# Altium PCB Comb_Generator_PCB.PcbDoc
Units mil, origin at the board's own origin, x right, y up, seen from the top; angles counter-clockwise.
Board outline 4523.62 x 2315 mil, 2 copper layers (Top Layer, Bottom Layer), stack 41.756 mil thick; 62 components, 73 nets, 211 pads, 256 vias.
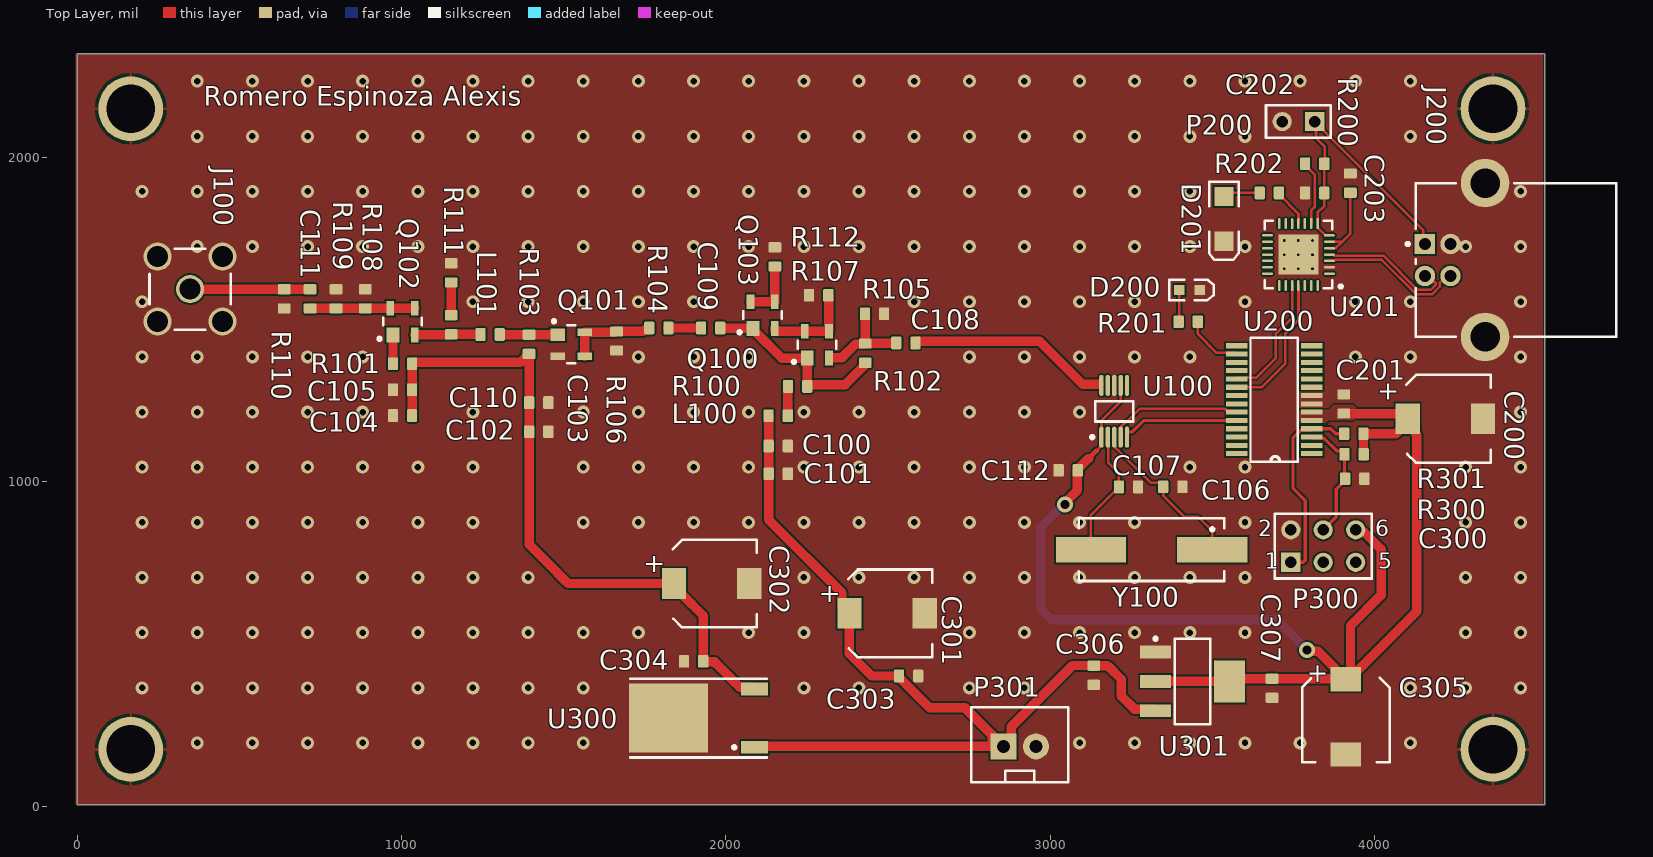
[diagram p0: Top Layer view]
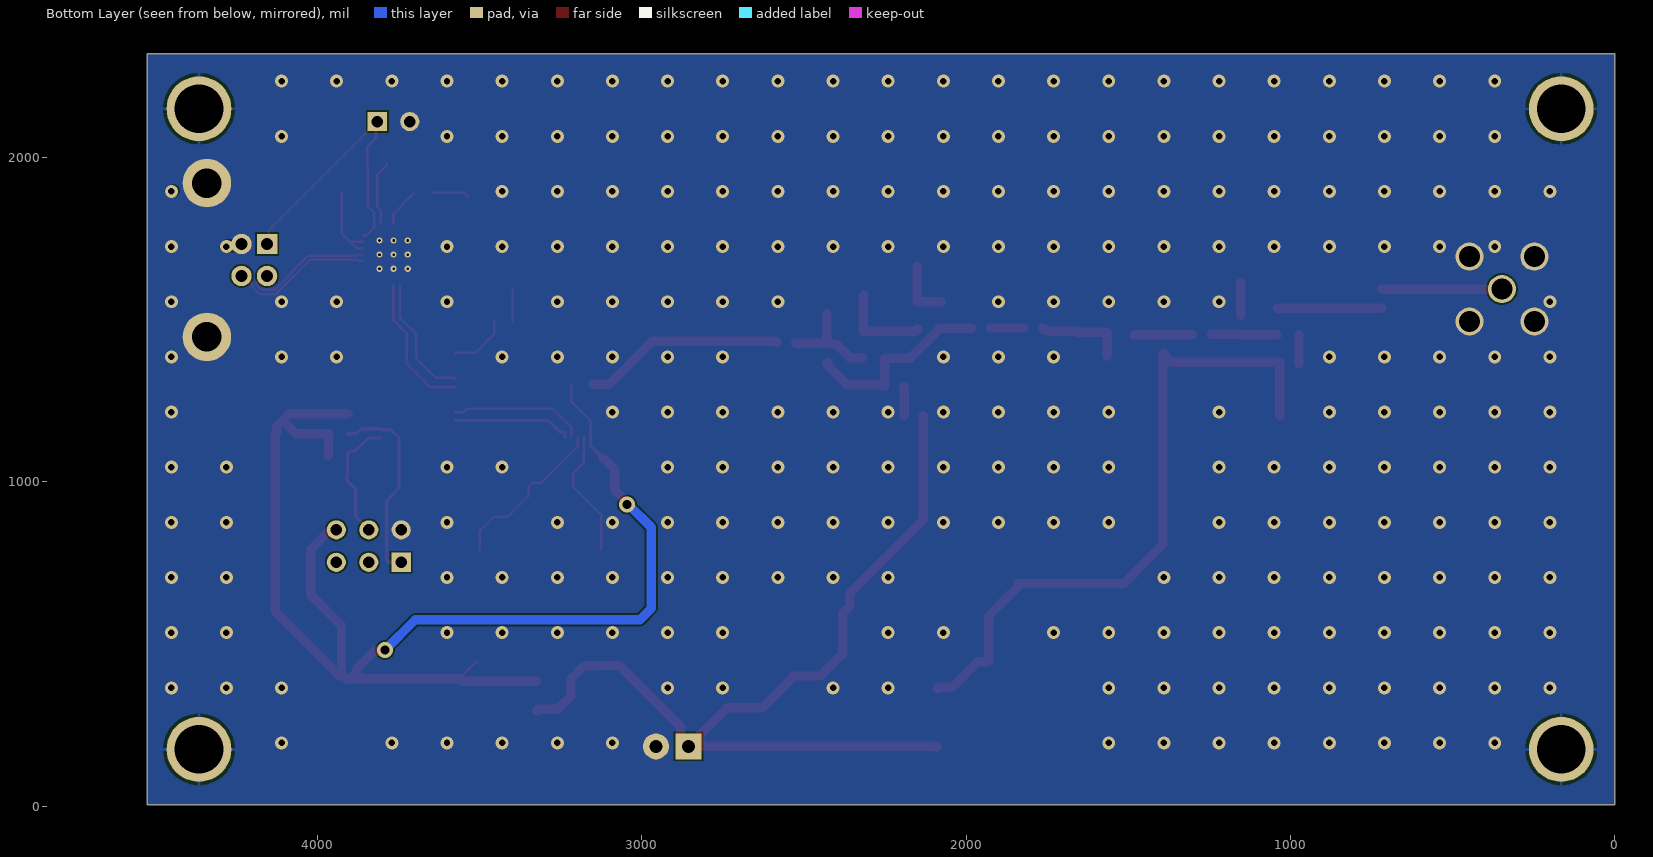
[diagram p1: Bottom Layer view, seen from below]
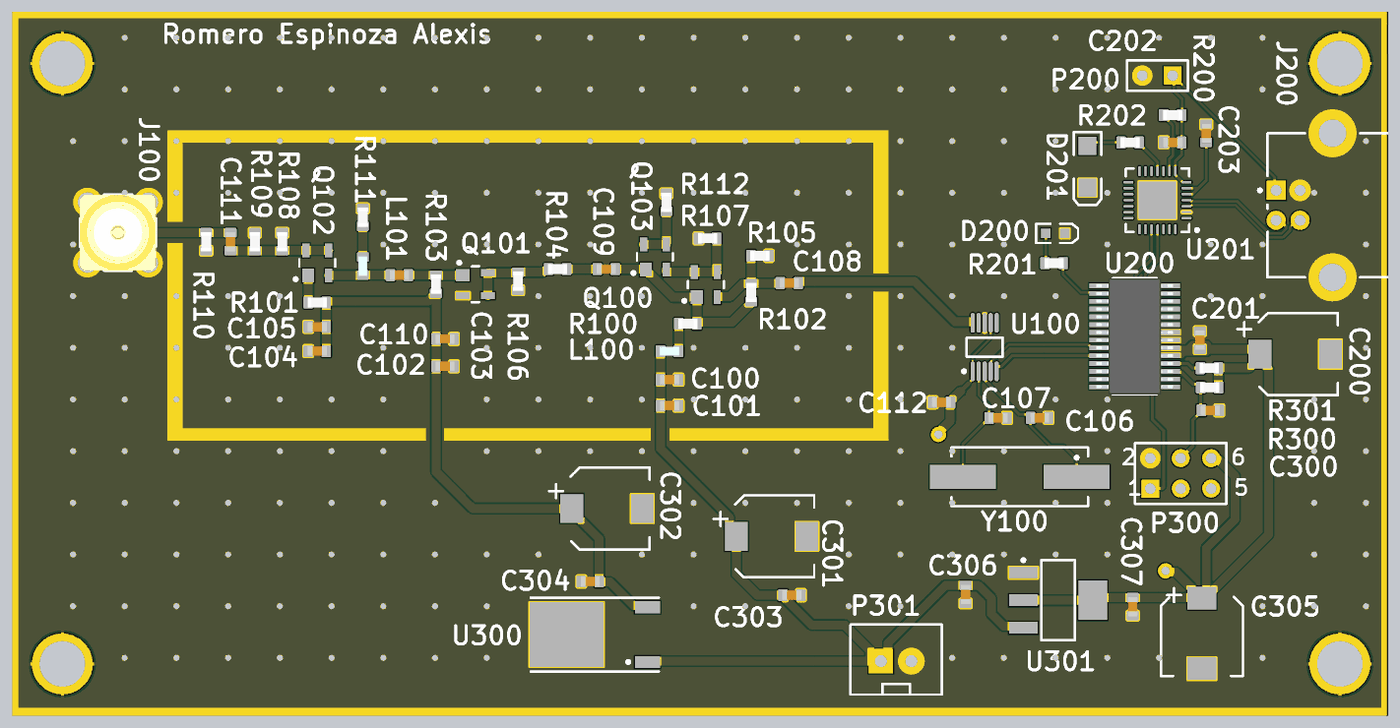
[diagram p2: 3D render of the assembled board from above, using the file's embedded part models]

## Layer stack, top to bottom
Top Solder: solder mask 1, Solder Resist, Dk 4
Top Layer: signal copper 1.378
Dielectric 1: core 39, Core-043, Dk 4.8
Bottom Layer: signal copper 1.378
Bottom Solder: solder mask 1, Solder Resist, Dk 4

## Board outline
0,5 4523.62,5 4523.62,2320 0,2320

## Design rules (kind name [scope] priority, off if disabled: settings)
Clearance [All] p1: gap=5 ignorepadtopadclearanceinfootprint=TRUE
DiffPairsRouting [InDifferentialPairClass('USB')] p1: maxlimit=5 minlimit=5 mostfreqgap=5 toplayer_minwidth=7.66 toplayer_maxwidth=7.66 toplayer_prefwidth=7.66 bottomlayer_minwidth=7.66 bottomlayer_maxwidth=7.66 bottomlayer_prefwidth=7.66 impedanceprofiledriven=TRUE impedanceprofileid={3DF94B06-C9B4-486B-9F6B-04F363C602BF} impedanceprofilevalue=90.000000 maxuncoupledlength=500
HoleSize [All] p1: absolutevalues=TRUE maxlimit=150 minlimit=1 maxpercent=80.000 minpercent=20.000
MinimumSolderMaskSliver [All] p1: minsoldermaskwidth=1.97
PlaneConnect [All] p1: planeconnectstyle=Direct reliefexpansion=20 reliefentries=4 reliefconductorwidth=10 reliefairgap=10
PolygonConnect [All] p1: connectstyle=Direct reliefconductorwidth=10 reliefentries=4 polygonreliefangle="90 Angle" airgapwidth=10
RoutingVias [All] p1: holewidth=28 width=50 viastyle="Through Hole" minholewidth=20 minwidth=40 maxholewidth=28 maxwidth=50
SilkToSilkClearance [All] p1: silktosilkclearance=1.97
SilkToSolderMaskClearance [IsPad] p1: minsilkscreentomaskgap=3.94 clearancetoexposedcopper=TRUE
SolderMaskExpansion [All] p1: expansion=4 istentingtop=FALSE
SupplyNets "Schematic Supply Nets_5" [InNet('REGIN')] p1: voltage=0.000
SupplyNets "Schematic Supply Nets_4" [InNet('+3.3')] p2: voltage=0.000
SupplyNets "Schematic Supply Nets_3" [InNet('+9')] p3: voltage=0.000
SupplyNets "Schematic Supply Nets_2" [InNet('GND')] p4: voltage=0.000
SupplyNets "Schematic Supply Nets" [InNet('+15')] p5: voltage=0.000
Width RF [InNetClass('RF_IMPEDANCE')] p1: maxlimit=29 minlimit=29 preferedwidth=29 impedanceprofiledriven=TRUE impedanceprofileid={12B5DFE3-A9B6-42D8-8155-5930BCDDC55F} impedanceprofilevalue=50.000000 minimp=50.000000 maximp=50.000000 favimp=50.000000
Width [All] p2: maxlimit=30 minlimit=8 preferedwidth=10
24 further rules are at their usual default settings.

## Classes and differential pairs
differential pair class USB: USB
net class RF_IMPEDANCE: +9 +15 GND NetC108_1 NetC108_2 NetC109_1 NetC109_2 NetC110_1 NetC110_2 NetC111_1 NetL100_2 NetL101_2 NetQ100_3 NetQ101_3 NetQ102_1 NetQ103_3 out
component class U_3_Alimentacion: C300 C301 C302 C303 C304 C305 C306 C307 P300 P301 R300 R301 U300 U301
component class U_2_Microcontrolador: C200 C201 C202 C203 D200 D201 J200 P200 R200 R201 R202 U200 U201
component class U_1_Comb_Generator_Sch: C100 C101 C102 C103 C104 C105 C106 C107 C108 C109 C110 C111 C112 J100 L100 L101 Q100 Q101 Q102 Q103 R100 R101 R102 R103 R104 R105 R106 R107 R108 R109 R110 R111 R112 U100 Y100
differential pair USB: +USB_P -USB_N

## Components (designator, comment, footprint, x,y, rotation, side; value= is the part's Value field where it differs from the comment)
C100 "1n" CAP_0603 2161.03,1110.18 r0 top
C101 "470p" CAP_0603 2161.03,1024.59 r0 top
C102 "470p" CAP_0603 1422.87,1154.02 r0 top
C103 "1u" CAP_0603 1422.87,1244.02 r0 top
C104 "1n" CAP_0603 1002.87,1204.02 r180 top
C105 "100p" CAP_0603 1002.87,1284.02 r180 top
C106 "3.9p" CAP_0603 3377.4,984.72 r0 top
C107 "3.9p" CAP_0603 3240.79,984.21 r0 top
C108 "1n" CAP_0603 2554.45,1428.07 r0 top
C109 "1n" CAP_0603 1952.87,1474.02 r180 top
C110 "470p" CAP_0603 1272.87,1454.02 r0 top
C111 "C0603" CAP_0603 717.87,1564.02 r90 top
C112 "100n" CAP_0603 3055.12,1035.67 r180 top
C200 "47u/16V" "C SIZE SMD CAPACITOR" 4212.6,1194.29 r0 top value=47
C201 "100n" CAP_0603 3904.33,1239.88 r90 top
C202 "100n" CAP_0603 3814.8,1890.51 r180 top
C203 "100n" CAP_0603 3924.8,1920.51 r90 top
C300 "100n" CAP_0603 3938.31,1009.13 r0 top
C301 "47u/16V" "C SIZE SMD CAPACITOR" 2491.42,594.61 r0 top value=47
C302 "47u/16V" "C SIZE SMD CAPACITOR" 1950.39,686.42 r0 top value=47
C303 "100n" CAP_0603 2563.11,401.3 r0 top
C304 "100n" CAP_0603 1900.39,446.42 r180 top
C305 "47u/16V" "C SIZE SMD CAPACITOR" 3910.87,280.51 r270 top value=47
C306 "100n" CAP_0603 3134.02,403.58 r270 top
C307 "100n" CAP_0603 3683.31,363.5 r270 top
D200 "HSMC-S690" 1.6X0.8X0.7 3428.9,1591.3 r0 top
D201 "HSMG-C150" 3.2X1.6X1.1 3534.8,1810.51 r270 top
J100 "32K101-400L5" ROS-32K101-400L5_V 347.87,1594.02 r270 top
J200 "787780-1" "USB 787780" 4247.48,1683.74 r90 top
L100 "100u" IND_0603 2160.83,1203.7 r0 top
L101 "3.3n" IND_0603 1152.87,1484.02 r90 top
P200 "Header 2" HDR1X2 3814.8,2110.51 r180 top
P300 "Header 3X2" HDR2X3 3741.18,751.85 r0 top
P301 "Conector Molex 2 vias Macho" "MOLEX INDENT 2 LOW PRF" 2855.75,184.29 r0 top
Q100 "BFG540" SOT143B_N 2280.28,1422.68 r90 top
Q101 "BFG540" SOT143B_N 1522.87,1424.02 r0 top
Q102 "BFG540" SOT143B_N 1002.87,1494.02 r90 top
Q103 "BFG540" SOT143B_N 2112.87,1514.02 r90 top
R100 "270" RES_0603 2220.83,1294.02 r180 top
R101 "1k" RES_0603 1002.87,1364.02 r0 top
R102 "560" RES_0603 2429.36,1396.49 r270 top
R103 "100" RES_0603 1392.87,1424.02 r270 top
R104 "10" RES_0603 1792.87,1474.02 r0 top
R105 "470" RES_0603 2457.99,1517.68 r180 top
R106 "100" RES_0603 1662.87,1434.02 r90 top
R107 "82" RES_0603 2285.86,1574.75 r0 top
R108 "1.2k" RES_0603 887.87,1564.02 r270 top
R109 "1.2k" RES_0603 797.87,1564.02 r270 top
R110 "56" RES_0603 637.87,1564.02 r90 top
R111 "24" RES_0603 1152.87,1644.02 r270 top
R112 "2.2" RES_0603 2150.73,1693.39 r270 top
R200 "10k" RES_0603 3814.8,1980.51 r0 top
R201 "1k" RES_0603 3424.96,1493.43 r180 top
R202 "1k" RES_0603 3674.8,1890.51 r180 top
R300 "10k" RES_0603 3936.34,1084.57 r180 top
R301 "10k" RES_0603 3935.35,1148.15 r0 top
U100 "Si5351A-A-GT" SLAB-MSOP-10_N 3196.85,1217.28 r90 top
U200 "" TSSOP28_25.5_295_15X58_SMD 3690,1252.95 r180 top value=MC9S08SH32
U201 "CP2103-GM" SLAB-QFN-28-3125x3125TP_A_N 3764.8,1700.51 r180 top locked
U300 "L78M09ABDT" TO-252 1955.39,271.42 r90 top
U301 "LD1117AS33TR" SOT-223_N 3438.19,384.53 r0 top
Y100 "HC49/4H_SMX" HC49/4H_SMX 3312.09,790.55 r180 top

## Footprints (in the part's own frame and the unit in brackets; to place one, negate y for a bottom-side part, rotate by r counter-clockwise, add the part's x,y. Pads: shape width x height; smd on the part's side, far side on the other; paste and mask are expansions set on the pad)
1.6X0.8X0.7 [mm] "SM LED; 2 Flat Leads"
  rect 0.8x0.8 smd: 1(-0.8,0) 2(0.8,0)
  silkscreen extent -1.6,-0.8 1.9,0.8
3.2X1.6X1.1 [mm] "SM LED; 2 Flat Leads"
  rect 1.5x1.5 smd: 1(-1.75,0) 2(1.75,0)
  silkscreen extent -2.9,-1.15 3.2,1.15
"C SIZE SMD CAPACITOR" [mm]
  rect 1.9x2.4 smd: 1(-2.819,0) 2(3.073,0)
  silkscreen extent -2.92,-3.43 3.68,3.43, body extent -3.47,-3.3 3.73,3.3, height 8.08
CAP_0603 [mm]
  rrect25% 0.8x1 smd: 1(-0.75,0) 2(0.75,0)
  body extent -0.8,-0.4 0.8,0.4, height 0.51
HC49/4H_SMX [mm] "Surface Mount Quartz Crystal; Body 13.4 (inc. leads) x 4.9 mm (LxW max)"
  rect 5.5x2 smd: 1(-4.75,0) 2(4.75,0)
  silkscreen extent -5.7,-2.45 5.7,2.45
HDR1X2 [mm] "Connector; Header; 2 Position"
  rect 1.5x1.5 hole 0.9: 1(0,0)
  round 1.5 hole 0.9: 2(2.54,0)
  silkscreen extent -1.27,-1.27 3.81,1.27
HDR2X3 [mm] "Connector; Header; 3x2 Position"
  rect 1.5x1.5 hole 0.9: 1(0,0)
  round 1.5 hole 0.9: 2(0,2.54) 3(2.54,0) 4(2.54,2.54) 5(5.08,0) 6(5.08,2.54)
  silkscreen extent -1.27,-1.27 6.35,3.81
IND_0603 [mm]
  rrect25% 0.8x1 smd: 1(-0.75,0) 2(0.75,0)
  body extent -0.81,-0.37 0.81,0.37, height 0.87
"MOLEX INDENT 2 LOW PRF" [mil]
  rect 80x80 hole 40: 1(0,0)
  round 80 hole 40: 2(100,0)
  silkscreen extent -100,-110 200,120
RES_0603 [mm]
  rrect25% 0.8x1 smd: 1(-0.75,0) 2(0.75,0)
  body extent -0.8,-0.43 0.8,0.43, height 0.52
ROS-32K101-400L5_V [mm] "SMA Straight Jack, 6.35x6.35x9.5mm, Rosenberger Recommended"
  round 2.2 hole 1.65: 1(0,0) MH(-2.54,2.54) MH(-2.54,-2.54) MH(2.54,2.54) MH(2.54,-2.54)
  silkscreen extent -3.18,-3.18 3.18,3.18, body extent -3.17,-3.17 3.18,3.18, height 9.5
SLAB-MSOP-10_N [mm] "SOP, 10-Leads, Body 3x3mm, Pitch 0.5mm, IPC Medium Density"
  oval 1.65x0.35 smd: 1(-2.025,1) 2(-2.025,0.5) 3(-2.025,0) 4(-2.025,-0.5) 5(-2.025,-1) 6(2.025,-1) 7(2.025,-0.5) 8(2.025,0) 9(2.025,0.5) 10(2.025,1)
  silkscreen extent -2.15,-1.5 0.8,1.85, body extent -1.5,-1.5 1.5,1.5, height 1.1
SLAB-QFN-28-3125x3125TP_A_N [mm] "QFN, 28-Leads, Body 5x5mm, Pitch 0.5mm, Thermal Pad 3.13x3.13mm, IPC Medium Density"
  oval 0.85x0.2 smd: 1(-2.425,1.5) 2(-2.425,1) 3(-2.425,0.5) 4(-2.425,0) 5(-2.425,-0.5) 6(-2.425,-1) 7(-2.425,-1.5) 15(2.425,-1.5) 16(2.425,-1) 17(2.425,-0.5) 18(2.425,0) 19(2.425,0.5) 20(2.425,1) 21(2.425,1.5)
  oval 0.2x0.85 smd: 8(-1.5,-2.425) 9(-1,-2.425) 10(-0.5,-2.425) 11(0,-2.425) 12(0.5,-2.425) 13(1,-2.425) 14(1.5,-2.425) 22(1.5,2.425) 23(1,2.425) 24(0.5,2.425) 25(0,2.425) 26(-0.5,2.425) 27(-1,2.425) 28(-1.5,2.425)
  rect 3.13x3.13 smd: 29(0,0)
  silkscreen extent -3.42,-2.65 2.65,2.65, body extent -2.5,-2.5 2.5,2.5, height 1
SOT143B_N [mm] "SOT143, 4-Leads, Body 2.9x1.3mm, Pitch 1.9mm, Lead Span 2.3mm, IPC Medium Density"
  rect 1.15x1 smd: 1(-1.05,0.75)
  rect 1.15x0.6 smd: 2(-1.05,-0.95) 3(1.05,-0.95) 4(1.05,0.95)
  silkscreen extent -1.47,-1.5 0.3,1.92, body extent -0.7,-1.52 0.7,1.52, height 1.1
SOT-223_N [mm] "SOT223, 4-Leads, Body 6.5x3.5mm, Pitch 2.3mm, Lead Span 7mm, IPC Medium Density"
  rect 2.4x1 smd: 1(-2.9,2.3) 2(-2.9,0) 3(-2.9,-2.3)
  rect 2.4x3.3 smd: 4(2.9,0)
  silkscreen extent -3.02,-3.35 1.4,3.47, body extent -1.85,-3.35 1.85,3.35, height 1.8
TO-252 [mm] "D-PAK/TO-252-AA; 3 Leads (1 Cropped); Body 10.1 (inc. leads) x 6.6 mm (LxW max)"
  rect 1x2.1 smd: 1(-2.285,-3.375) 3(2.285,-3.375)
  rect 5.4x6.2 smd: 4(0,3.375)
  silkscreen extent -3.09,-4.32 3.09,6.38
TSSOP28_25.5_295_15X58_SMD [mm] "CASE: TSSOP"
  rect 1.7x0.4 smd mask+0.076: 1(-2.938,4.225) 2(-2.938,3.575) 3(-2.938,2.925) 4(-2.938,2.275) 5(-2.938,1.625) 6(-2.938,0.975) 7(-2.938,0.325) 8(-2.938,-0.325) 9(-2.938,-0.975) 10(-2.938,-1.625) 11(-2.938,-2.275) 12(-2.938,-2.925) 13(-2.938,-3.575) 14(-2.938,-4.225) 15(2.938,-4.225) 16(2.938,-3.575) 17(2.938,-2.925) 18(2.938,-2.275) 19(2.938,-1.625) 20(2.938,-0.975) 21(2.938,-0.325) 22(2.938,0.325) 23(2.938,0.975) 24(2.938,1.625) 25(2.938,2.275) 26(2.938,2.925) 27(2.938,3.575) 28(2.938,4.225)
  silkscreen extent -1.85,-4.85 1.85,4.85, body extent -3.2,-4.85 3.2,4.85, height 1.1
"USB 787780" [mm]
  rect 1.6x1.6 hole 0.92: 1(1.25,2.355)
  round 1.6 hole 0.92: 2(-1.25,2.355) 3(-1.25,0.355) 4(1.25,0.355)
  round 3.8 hole 2.3: 5(6.02,-2.355) 6(-6.02,-2.355)
  silkscreen extent -6.02,-12.63 6.02,3.83, body extent -7.44,-12.63 7.44,4.37, height 11.03

## Part data
C100 C101 C102 C103 C104 C105 C106 C107 C108 C109 C110 C111 C112 C201 C202 C203 C300 C303 C304 C306 C307: library part CAP_0603, "Capacitor SMD 0603"
C200 C301 C302 C305: library part "Cap Pol1", "Capacitor Electr. Alum. SMD WxLxH 6.3x6.3x5.3 Ǿ= 6 mm", Manufacturer="Generic Components", Voltage=16, ASY=R, ASY_CRITICO=S, ASY_DESCRIPTION="Electrónica Galert 500P+", auto_range=#NAME?, Class=Passive, CRITICO=NO, Diam=6.3, ELEMON=EH51EM470E05OC, Exponent=#NAME?, GAMMASYS=#NAME?#NAME?160607, Height=10, NORM=#NAME?, PackageReference=0607, PDT=PDT_GA500P+, Published=08/06/2000, Publisher="Altium Hobart Technology Centre", SubClass=Capacitor, Units=u
D200: "SMT Top Mount Chip LED, Red", LED_Colour=Red, PackageDocument=29-Oct-2001, ComponentLink1Description="Manufacturer Link", ComponentLink1URL=http://www.agilent.com/, ComponentLink2Description=Datasheet, ComponentLink2URL=http://cp.literature.agilent.com/litweb/pdf/5988-4445EN.pdf, DatasheetDocument=29-Oct-2001, LuminousIntensity="16mcd (Minimum).", PackageReference=1.6X0.8X0.7, PCB_Layout="Complies with manufacturer's recommendation.", Published=11-Dec-2002, Publisher="Altium Limited"
D201: "Surface Mount Chip LED, Green", LED_Colour=Green, PackageDocument=26-Feb-2002, ComponentLink1Description="Manufacturer Link", ComponentLink1URL=http://www.agilent.com/, ComponentLink2Description=Datasheet, ComponentLink2URL=http://cp.literature.agilent.com/litweb/pdf/5988-6271EN.pdf, DatasheetDocument=30-Apr-2002, LuminousIntensity="4mcd (Minimum).", PackageReference=3.2X1.6X1.1, PCB_Layout="Complies with manufacturer's recommendation.", Published=11-Dec-2002, Publisher="Altium Limited"
J100: library part CMP-0751-00001-1, "SMA Straight Jack, Up to 18 GHz, -55 to 155 degC", Manufacturer=Rosenberger, ComponentLink1Description="Manufacturer URL", ComponentLink1URL=http://www.rosenberger.de, ComponentLink2Description=Datasheet, ComponentLink2URL=http://rosenberger.de/ok/images/documents/db/32K101-400L5.pdf, ComponentLink3Description="Package Specification", ComponentLink3URL=http://rosenberger.de/ok/images/documents/db/32K101-400L5.pdf, ComponentLink4Description="Series Overview / Design Note", ComponentLink4URL=http://rosenberger.de/ok/images/documents/spez/32.pdf, ComponentLink5Description="Webshop / RFQ", ComponentLink5URL=http://www.rosenberger.com/en/contact/sales/, DatasheetVersion=a00, Design Note="Footprint in library is a generic example - only application specific footprint delivers High Performance", Mounting Technology="Through Hole", PackageDescription="SMA Straight Jack, 6.35 x 6.35 x 9.5 mm", PackageReference=32K101-400L5, PackageVersion=a00, PartNumber=32K101-400L5
J200: "USB 1.1, Right Angle, Thru-Hole, B Type, Receptacle, 4 Position, Black", PackageDocument=11-Jan-2004, ComponentLink1Description="Manufacturer Link", ComponentLink1URL=http://www.tycoelectronics.com/, ComponentLink2Description="Packaging Specification", ComponentLink2URL=http://ecommas.tycoelectronics.com/commerce/DocumentDelivery/DDEController?Action=showdoc&DocId=Customer+Drawing%7F787780%7FF%7Ftif%7FEnglish%7FENG_CD_787780_F.tif, ContactMaterial="Copper Alloy", ContactPlating="Gold Flash over Palladium Nickel or Gold (30) over Nickel", DatasheetDocument=11-Jan-2004, DrillSize="Corresponds to nominal value.", HousingMaterial=Thermoplastic, PackageReference=787780, PanelGround=Without, PCB_Layout="Complies with manufacturer's recommendation.", Published=15-Jul-2004, Publisher="Altium Limited", TerminationLength="3.00mm [0.118in.]"
L100 L101: library part IND_0603, "Inductor SMD 0603"
P200: "Header, 2-Pin", LatestRevisionDate=17-Jul-2002, LatestRevisionNote="Re-released for DXP Platform.", Publisher="Altium Limited"
P300: "Header, 3-Pin, Dual row", LatestRevisionDate=17-Jul-2002, LatestRevisionNote="Re-released for DXP Platform.", Publisher="Altium Limited"
P301: library part "Header 2", "Header, 2-Pin", ASY=R, ASY_CRITICO=S, ASY_DESCRIPTION="Electrónica Galert 500P+", CRITICO=NO, GAMMASYS=P2317SJ-02, LatestRevisionDate=17-Jul-2002, LatestRevisionNote="Re-released for DXP Platform.", PDT=PDT_GA500P+, Publisher="Altium Limited", SYC=2317SJ-02
Q100 Q101 Q102 Q103: "NPN 9 GHz Wideband Transistor", ComponentLink1Description="Manufacturer Link", ComponentLink1URL=http://www.semiconductors.philips.com/, ComponentLink2Description=Datasheet, ComponentLink2URL=http://www.semiconductors.philips.com/acrobat/datasheets/BFG540_X_XR_4.pdf, DatasheetVersion=23-May-2000, LatestRevisionDate=12-Dec-2006, LatestRevisionNote="IPC-7351 Footprint Added.", PackageDescription="4-Pin SOT-143 Package 1.9 mm Pitch, 2.3 mm Lead Span", PackageReference=SOT143B, PackageVersion=Oct-2001, Published=17-Sep-2003, Publisher="Altium Limited"
R100 R101 R102 R103 R104 R105 R106 R107 R108 R109 R110 R111 R112 R200 R201 R202 R300 R301: library part RES_0603, "Resistor SMD 0603"
U100: "I2C-Programmable Any-Frequency CMOS Clock Generator + VCXO, 2.5 / 3.3 V, 0.008 to 160 MHz Output, -40 to 85 degC, 10-pin SOP", Manufacturer="Silicon Labs", Output Frequency (MHz)="0.008 to 160", Supplier Part Number 1=336-1994-5-ND, Code_IPC=J-STD-020, Code_JEDEC=MO-187, ComponentLink1Description="Manufacturer URL", ComponentLink1URL=http://www.silabs.com/, ComponentLink2Description=Datasheet, ComponentLink2URL=http://www.silabs.com/Support%20Documents/TechnicalDocs/Si5351.pdf, ComponentLink3Description="Package Specification", ComponentLink3URL="http://www.silabs.com/Support Documents/TechnicalDocs/C8051T60x.pdf", DatasheetVersion="Rev. 0.95", Mounting Technology="Surface Mount", Output Format=LVCMOS, PackageDescription="10-Pin Mini Small Outline Package, Body 3 x 3 mm, Pitch 0.5 mm", PackageReference=MSOP-10, PartNumber=Si5351A-A-GT, Reference Inputs=1, Sub-Family="Clock Generators", Supplier 1=Digi-Key, Supplier 2=Mouser, Supplier Part Number 2=634-SI5351A-A-GT, VDD="2.5 V; 3.3 V"
U200: library part MC9S08SH32CTL, "IC MCU 8BIT 32KB FLASH 28TSSOP / WITH AUTO-DIRECTION SENSING AND ±15-kV ESD PROTECTION", Manufacturer="NXP USA Inc.", Part Number=MC9S08SH32CTL_TSSOP28, Supplier Part Number 1=MC9S08SH32CTL-ND, Aprobo=-, Manufacturer Part Number=MC9S08SH32CTL, Publico=AP, Supplier 1=Digi-Key
U201: "Single-Chip USB to UART Bridge, 1024 Bytes EEPROM, -40 to 85 degC, 28-pin QFN, Tube", Manufacturer="Silicon Labs", Supplier Part Number 1=336-1164-ND, ComponentLink1Description="Manufacturer URL", ComponentLink1URL=http://www.silabs.com/, ComponentLink2Description=Datasheet, ComponentLink2URL=http://www.silabs.com/Support%20Documents/TechnicalDocs/CP2103.pdf, ComponentLink3Description="Package Specification", ComponentLink3URL=http://www.silabs.com/Support%20Documents/TechnicalDocs/C8051F35x.pdf, DatasheetVersion="Rev. 1.0", EEPROM="1024 Bytes", Internal Oscillator=TRUE, Mounting Technology="Surface Mount", PackageDescription="28-Pin Quad-Flat No-Leads Package, Body 5 x 5 mm, Pitch 0.5 mm", PackageReference=QFN-28, PartNumber=CP2103-GM, Sub-Family="USB Bridges", Supplier 1=Digi-Key, Supplier 2=Farnell, Supplier 3=Newark, Supplier 4=Mouser, Supplier Part Number 2=1291538, Supplier Part Number 3=24M1109, Supplier Part Number 4=634-CP2103-GM
U300: "Precision 500mA Regulator", ComponentLink1Description="Manufacturer Link", ComponentLink1URL=http://www.st.com/, ComponentLink2Description=Datasheet, ComponentLink2URL=http://www.st.com/stonline/products/literature/ds/2147/l78m05ab.pdf, DatasheetVersion=Mar-1997, LatestRevisionDate=06-Jun-2005, LatestRevisionNote="PCB pads lengthened.", PackageDescription="D-PAK/TO-252-AA; 3 Leads (1 Cropped); Body 10.1 (inc. leads) x 6.6 mm (LxW max)", PackageReference=TO-252, PackageVersion=Jun-2004, Published=24-Aug-2001, Publisher="Altium Limited"
U301: "1A, Low Drop Positive Voltage Regulator, 3.3V, 4-Pin SOT-223, Tape and Reel", ComponentLink1Description="Manufacturer URL", ComponentLink1URL=http://www.st.com, ComponentLink2Description=Datasheet, ComponentLink2URL=http://www.st.com/internet/com/TECHNICAL_RESOURCES/TECHNICAL_LITERATURE/DATASHEET/CD00002116.pdf, DatasheetVersion=Dec-2011, PackageDescription="4-Pin SOT-223 Package, 6.5 x 3.5 mm Body, 2.3 mm Pitch, 7 mm Lead Span", PackageReference=SOT-223, PackageVersion=2010, PartNumber=LD1117AS33TR
Y100: "Surface Mount Quartz Crystal", PackageDocument=18-Oct-1999, ComponentLink1Description="Manufacturer Link", ComponentLink1URL=http://www.cmac.com/mt/, ComponentLink2Description=Datasheet, ComponentLink2URL=http://www.cmac.com/mt/databook/crystals/smd/hc49_4h_smx.pdf, DatasheetDocument=18-Oct-1999, Note="PCB layout complies with manufacturer's recommendation.", PackageReference=HC49/4H_SMX, Published=17-Jul-2002, Publisher="Altium Limited"

## Free pads (board coordinates)
  round 200 hole 150: 1(165,175) 1(165,2150) 1(4364.57,175) 1(4364.57,2150)

## Via types
v1: diameter 40/40 (per signal layer), hole 20, Top Layer to Bottom Layer, 245 vias
v2: diameter 19.68, hole 7.87, Top Layer to Bottom Layer, 9 vias
v3: diameter 50, hole 28, Top Layer to Bottom Layer, 2 vias

## Nets (pads, with @x,y where several pads share a name; then routed paths per layer and width w, separated by ;. In a path a pad name is that pad's centre, name@x,y a point inside that pad or via, vN(x,y) a via of type N, cw(c..) or ccw(c..) an arc to the next point about the centre after c; other vN are vias at no path point)
+3.3: C112.1 C200.1 C201.1 C305.1 C307.1 P300.6 R300.1 R301.2 U100.1 U100.7 U200.5 U200.6 U301.2 U301.4 | length 4369.6
  Top Layer w8: 3141.73,1095.47 3157.48,1111.22 3157.48,1188.31 3216.54,1247.36 U100.7 ; U301.4@3509.12,445.49 3552.36,402.24 U301.4
  Top Layer w15: 3118.11,1071.85 3141.73,1095.47
  Top Layer w29: v3(3045,930) 3045,935.68 3083.4,974.08 3083.4,1034.42 C112.1 3084.65,1039.61 3116.89,1071.85 3118.11,1071.85 ; U301.2 U301.4 3560.87,393.03 C307.1 3909.33,393.03 C305.1 ; v3(3791.34,481.3) 3795.36,477.28 3825.08,477.28 3878.12,424.24 3878.12,414.4 3901.02,391.5 C305.1 ; C201.1 4085.55,1210.35 C200.1 ; C305.1@3930.12,400.91 3941.18,411.97 4129.92,600.71 4129.92,1144.56 4124.52,1149.96 4124.52,1171.39 C200.1 ; P300.6 3946.93,846.1 3965.91,846.1 4019.68,792.32 4019.68,650.59 3925.2,556.1 3925.2,405.83 C305.1 ; R300.1@3965.87,1080.63 R300.1 3965.37,1085.06 3965.37,1147.66 R301.2 4065.32,1148.15 4101.61,1184.45 C200.1
  Bottom Layer w29: v3(3045,930) 3041.01,930 2970,858.99 2970,610 3005,575 3697.64,575 v3(3791.34,481.3)
+9: C102.1 C103.1 C104.1 C105.1 C302.1 C304.1 R101.2 R103.2 U300.3 | length 2083.6
  Top Layer w29: C104.1 C105.1 R101.2 1032.4,1367.95 1366.34,1367.95 1387.69,1389.3 1387.69,1393.24 1388.94,1394.49 R103.2 ; C103.1@1393.11,1244.02 R103.2@1393.11,1394.25 ; C103.1 1393.35,806.65 1480.5,719.5 1480.5,718.64 1503.64,695.5 1504.5,695.5 1513.58,686.42 C302.1 ; C302.1@1839.41,676.58 1862.31,653.67 1863.14,653.67 1929.92,586.89 1929.92,445.96 1931.17,444.71 1964.86,444.71 1984.39,425.17 2023.47,386.1 2043,366.56 2083.08,366.56 U300.3
+15: C100.1 C101.1 C301.1 C303.1 C306.1 L100.1 P301.1 U300.1 U301.3 | length 2927
  Top Layer w29: U300.1 2091.1,184.29 P301.1@2820.32,184.29 ; L100.1 2131.4,1203.6 2131.4,1110.28 C100.1 C101.1 2131.5,883.06 2357.56,657.01 2357.56,617.48 C301.1 2380.43,470.07 2449.2,401.3 C303.1 2533.58,397.36 2627.99,302.95 2737.09,302.95 P301.1@2820.32,219.72 ; C306.1@3133.39,433.74 3068.31,433.74 2879.07,244.5 2879.07,209.76 2872.04,202.74 P301.1@2837.3,202.74 ; C306.1 3175.2,433.11 3177.89,430.42 3179.58,430.42 3218.78,391.22 3218.78,339.37 3259.02,299.13 3318.86,299.13 U301.3 ; P301.1@2820.32,184.29 P301.1@2820.32,219.72 ; P301.1@2820.32,184.29 P301.1 P301.1@2837.3,202.74 ; P301.1@2820.32,219.72 P301.1@2837.3,202.74
BKGD: P300.1 R301.1 U200.4 | length 616.1
  Top Layer w10: P300.1 3779.85,751.85 3785.71,757.71 3785.71,942.01 3748.03,979.69 3748.03,1135.64 3772.91,1160.51 3802.8,1160.51 U200.4 3864.39,1163.39 3879.62,1148.15 R301.1
GND: C100.2 C101.2 C102.2 C103.2 C104.2 C105.2 C106.2 C107.2 C112.2 C200.2 C201.2 C202.2 C203.2 C300.2 C301.2 C302.2 C303.2 C304.2 C305.2 C306.2 C307.2 D200.2 D201.2 J100.MH J200.4 J200.5 J200.6 P200.2 P300.2 P301.2 pad.1 Q101.2 R105.1 R106.1 R107.1 R108.1 R109.1 R110.1 R111.1 R112.1 U100.8 U200.7 U200.8 U201.2 U201.29 U300.4 U301.1 | length 178.4
  Top Layer w29: J200.4 4239.35,1727.1 4277.9,1727.1 v1(4280,1725) ; J200.5 J200.5@4363.27,1897.67 ; v1@4444.35,1897.67 4447.02,1895 v1(4450,1895)
  Bottom Layer w29: J200.4 4239.35,1727.1 4277.9,1727.1 v1(4280,1725) ; J200.5 J200.5@4363.27,1897.67 ; v1@4444.35,1897.67 4447.02,1895 v1(4450,1895)
  other v1: 370,195 540,195 710,195 880,195 1050,195 1220,195 1390,195 1560,195 3090,195 3260,195 3430,195 3600,195 3770,195 4110,195 200,365 370,365 540,365 710,365 880,365 1050,365 1220,365 1390,365 1560,365 2240,365 2410,365 2750,365 2920,365 4110,365 4280,365 4450,365 200,535 370,535 540,535 710,535 880,535 1050,535 1220,535 1390,535 1560,535 1730,535 2070,535 2240,535 2750,535 2920,535 3090,535 3260,535 3430,535 3600,535 4280,535 4450,535 200,705 370,705 540,705 710,705 880,705 1050,705 1220,705 1390,705 2240,705 2410,705 2580,705 2750,705 2920,705 3090,705 3260,705 3430,705 3600,705 4280,705 4450,705 200,875 370,875 540,875 710,875 880,875 1050,875 1220,875 1560,875 1730,875 1900,875 2070,875 2240,875 2410,875 2580,875 2750,875 2920,875 3090,875 3260,875 3600,875 4280,875 4450,875 200,1045 370,1045 540,1045 710,1045 880,1045 1050,1045 1220,1045 1560,1045 1730,1045 1900,1045 2070,1045 2240,1045 2410,1045 2580,1045 2750,1045 2920,1045 3430,1045 3600,1045 4280,1045 4450,1045 200,1215 370,1215 540,1215 710,1215 880,1215 1220,1215 1560,1215 1730,1215 1900,1215 2070,1215 2240,1215 2410,1215 2580,1215 2750,1215 2920,1215 3090,1215 4450,1215 200,1385 370,1385 540,1385 710,1385 880,1385 1730,1385 1900,1385 2070,1385 2750,1385 2920,1385 3090,1385 3260,1385 3430,1385 3940,1385 4110,1385 4450,1385 200,1555 1220,1555 1390,1555 1560,1555 1730,1555 1900,1555 2580,1555 2750,1555 2920,1555 3090,1555 3260,1555 3600,1555 3940,1555 4110,1555 4450,1555 370,1725 540,1725 710,1725 880,1725 1050,1725 1220,1725 1390,1725 1560,1725 1730,1725 1900,1725 2070,1725 2240,1725 2410,1725 2580,1725 2750,1725 2920,1725 3090,1725 3260,1725 3430,1725 3600,1725 4450,1725 200,1895 370,1895 540,1895 710,1895 880,1895 1050,1895 1220,1895 1390,1895 1560,1895 1730,1895 1900,1895 2070,1895 2240,1895 2410,1895 2580,1895 2750,1895 2920,1895 3090,1895 3260,1895 3430,1895 370,2065 540,2065 710,2065 880,2065 1050,2065 1220,2065 1390,2065 1560,2065 1730,2065 1900,2065 2070,2065 2240,2065 2410,2065 2580,2065 2750,2065 2920,2065 3090,2065 3260,2065 3430,2065 3600,2065 4110,2065 370,2235 540,2235 710,2235 880,2235 1050,2235 1220,2235 1390,2235 1560,2235 1730,2235 1900,2235 2070,2235 2240,2235 2410,2235 2580,2235 2750,2235 2920,2235 3090,2235 3260,2235 3430,2235 3600,2235 3770,2235 3940,2235 4110,2235
  other v2: 3721.5,1657.2 3764.8,1657.2 3808.11,1657.2 3721.5,1700.51 3764.8,1700.51 3808.11,1700.51 3721.5,1743.82 3764.8,1743.82 3808.11,1743.82
NetC106_1: C106.1 U100.3 Y100.1 | length 512.7
  Top Layer w8: U100.3 3196.85,1110.4 3199.74,1107.51 3199.74,1106.29 3210.8,1095.24 3309.56,996.47 3336.13,996.47 C106.1 3347.87,957.13 3413.24,891.76 3455.84,891.76 3499.09,848.5 Y100.1
NetC107_1: C107.1 U100.2 Y100.2 | length 396.8
  Top Layer w8: Y100.2 3125.08,898.03 C107.1 3211.26,1025.94 3178.27,1058.93 3178.27,1136.45 U100.2
NetC108_1: C108.1 Q100.2 R102.1 R105.2 | length 313.8
  Top Layer w29: Q100.2@2320.37,1382.71 2358.08,1382.71 2400.14,1424.77 2428.11,1424.77 R102.1 ; R105.2 2428.46,1510.54 2429.36,1509.64 2429.36,1427.27 2434.1,1427.27 2434.32,1427.05 2523.9,1427.05 C108.1
NetC108_2: C108.2 U100.10 | length 625.2
  Top Layer w29: C108.2 2583.98,1431.82 2585.22,1433.07 2966.93,1433.07 3099.8,1300.2 3149.87,1300.2
NetC109_1: C109.1 Q100.1 Q103.1 R100.1 R102.2 | length 608.5
  Top Layer w29: C109.1 1983.07,1473.35 2082.68,1473.35 Q103.1 2083.35,1469.72 2171.73,1381.34 Q100.1 R100.1@2250.75,1298.34 ; R100.1 2250.36,1297.95 2251.61,1299.2 2367.1,1299.2 2424.17,1356.27 2424.17,1365.72 2425.42,1366.97 R102.2
NetC109_2: C109.2 R104.2 | length 100.9
  Top Layer w29: R104.2 C109.2
NetC110_1: C110.1 L101.1 Q102.2 | length 204
  Top Layer w29: Q102.2 1041.18,1453.58 1151.97,1453.58 L101.1 1153.11,1454.25 1243.11,1454.25 C110.1
NetC110_2: C110.2 Q101.1 R103.1 | length 179.3
  Top Layer w29: C110.2 1302.64,1453.78 1392.64,1453.78 R103.1 Q101.1
NetC111_1: C111.1 Q102.3 Q102.4 R108.2 R109.2 | length 319.9
  Top Layer w29: C111.1 R109.2 R108.2 888.31,1534.92 Q102.4@962.78,1534.92 ; Q102.4 Q102.3
NetC203_1: C203.1 U201.5 U201.6 | length 247
  Top Layer w8: U201.5 3860.34,1720.26 3879.15,1720.26 3898.77,1739.88 ; U201.6 3898.77,1739.88 ; C203.1 3924.8,1765.91 3898.77,1739.88
NetD200_1: D200.1 R201.2 | length 98.7
  Top Layer w8: R201.2 3397.4,1495.39 D200.1
NetD201_1: D201.1 R202.2 | length 115.1
  Top Layer w8: D201.1 3545.91,1890.51 R202.2
NetL100_2: L100.2 R100.2 | length 90.7
  Top Layer w29: L100.2 2190.83,1204.17 2190.83,1293.54 R100.2
NetL101_2: L101.2 R111.2 | length 100.9
  Top Layer w29: L101.2 R111.2
NetP300_3: P300.3
NetP300_5: P300.5
NetQ100_3: Q100.3 Q100.4 Q103.2 R107.2 | length 285.9
  Top Layer w29: Q103.2 2150.28,1467.23 2153.49,1464.02 Q100.4 Q100.3 2316.53,1465.16 2316.53,1573.61 R107.2
NetQ101_3: Q101.3 Q101.4 R104.1 R106.2 | length 277.5
  Top Layer w29: Q101.3 Q101.4 1656.81,1461.42 1658.94,1463.54 R106.2 ; R106.2@1666.81,1463.54 1745.11,1463.54 1750.4,1468.83 1762.1,1468.83 1763.35,1470.08 R104.1
NetQ102_1: Q102.1 R101.1 | length 88.7
  Top Layer w29: R101.1 Q102.1
NetQ103_3: Q103.3 Q103.4 R112.2 | length 183.3
  Top Layer w29: Q103.4 2147.59,1555.35 Q103.3 R112.2@2150.28,1663.86
NetR200_1: R200.1 U201.9 | length 201.2
  Top Layer w8: R200.1 3785.28,1976.57 3814.8,1947.05 3814.8,1846.55 3804.17,1835.92 U201.9
NetR201_1: R201.1 U200.16 | length 183.1
  Top Layer w8: R201.1 3454.49,1455.95 3512.86,1397.57 3570.46,1397.57 U200.16
NetU100_6: U100.6
NetU100_9: U100.9
NetU200_1: U200.1
NetU200_2: U200.2
NetU200_9: U200.9
NetU200_10: U200.10
NetU200_11: U200.11
NetU200_12: U200.12
NetU200_13: U200.13
NetU200_14: U200.14
NetU200_15: U200.15
NetU200_17: U200.17
NetU200_18: U200.18
NetU200_21: U200.21
NetU200_22: U200.22
NetU200_25: U200.25
NetU200_26: U200.26
NetU200_27: U200.27
NetU200_28: U200.28
NetU201_1: U201.1
NetU201_10: U201.10
NetU201_12: U201.12
NetU201_13: U201.13
NetU201_14: U201.14
NetU201_15: U201.15
NetU201_16: U201.16
NetU201_17: U201.17
NetU201_18: U201.18
NetU201_19: U201.19
NetU201_20: U201.20
NetU201_21: U201.21
NetU201_22: U201.22
NetU201_23: U201.23
NetU201_26: U201.26
NetU201_27: U201.27
NetU201_28: U201.28
out: C111.2 J100.1 R110.2 | length 370.2
  Top Layer w29: J100.1 348.11,1593.78 637.64,1593.78 R110.2 C111.2
REGIN: C202.1 J200.1 P200.1 R200.2 U201.7 U201.8 | length 912.6
  Top Layer w8: C202.1@3844.33,1886.57 3844.33,1850.62 3823.86,1830.15 U201.8 3823.86,1783.31 3847.54,1759.63 3847.61,1759.57 U201.7 ; C202.1 R200.2 3846.46,1980.51 3846.46,2032.48 3818.9,2060.04 3818.9,2106.42 P200.1 4150,1775.31 J200.1@4150,1730
RESET: C300.1 P300.4 R300.2 U200.3 | length 380.8
  Top Layer w10: U200.3 3808.54,1134.92 3843.19,1134.92 3883.01,1095.11 3896.27,1095.11 R300.2 ; P300.4 3881.22,891.89 3881.22,977.64 3908.78,1005.2 3908.78,1013.07 3906.81,1015.04 R300.2@3906.81,1080.63
RXD: U200.19 U201.24 | length 392
  Top Layer w8: U200.19 3577.96,1320.56 3634.53,1320.56 3694.57,1380.59 3694.57,1455 3745.12,1505.55 U201.24
SCL: U100.4 U200.23 | length 417.4
  Top Layer w8: U100.4 3217.22,1138.24 3217.22,1170 3230.1,1182.87 3233.07,1182.87 3275.59,1225.39 3535.03,1225.39 3537.14,1223.28 3540.18,1223.28 3544.87,1218.6 3544.87,1218.44 3548.74,1214.57 U200.23
SDA: U100.5 U200.24 | length 367.8
  Top Layer w10: U100.5 3236.22,1151.85 3237.97,1153.59 3252.25,1153.59 3287.64,1188.98 U200.24
SUSPEND: R202.1 U201.11 | length 119.6
  Top Layer w8: R202.1 3704.33,1886.57 3764.8,1826.1 U201.11
TXD: U200.20 U201.25 | length 437.5
  Top Layer w8: U200.20 3650.91,1291.34 3724.57,1365 3724.57,1457.83 3764.8,1498.07 U201.25
USB_N: J200.2 U201.4 | length 427.2
  Top Layer w7.66: U201.4 3873.13,1700.51 3876.64,1697 4026.68,1697 4132.14,1591.54 4172.57,1591.54 4187.8,1606.77 4187.8,1613.12 4166.39,1634.53 J200.2
USB_P: J200.3 U201.3 | length 448.2
  Top Layer w7.66: U201.3 3873.13,1680.83 3876.64,1684.34 4021.43,1684.34 4126.9,1578.88 4177.82,1578.88 4200.46,1601.53 4200.46,1613.12 4221.87,1634.53 J200.3

## Polygon pours and split planes (outlines as drawn)
GND on Bottom Layer "GND_L02_P001" (solid, pour order 1): 0,2320 4523.62,2320 4523.62,5 0,5
GND on Top Layer "GND_L01_P005" (solid, pour order 5): -5,2320 4518.62,2320 4518.62,5 -5,5
+3.3 on Top Layer "+3.3_L01_P004" (solid, pour order 4): 3767.72,1186.02 3775.59,1178.15 3846.46,1178.15 3858.27,1189.96 3933.07,1189.96 3940.94,1197.83 3940.94,1229.33 3933.07,1237.2 3874.02,1237.2 3858.27,1221.46 3771.65,1221.46 3767.72,1217.52
no net on Top Solder "NONET_L-01_P-001" (solid): 510,1930 2880,1930 2880,910 510,910

## Silkscreen, mask and mechanical layers (free items; w line width, h text height)
Top Overlay:
  text "Romero Espinoza Alexis" at 389.77,2160 h60
Top Solder:
  pour cut-out: 2820,1460 2880,1460 2880,1400 2820,1400
  pour cut-out: 2100,960 2160,960 2160,900 2100,900
  pour cut-out: 2830,1890 2830,950 560,950 560,1890
  pour cut-out: 1360,960 1420,960 1420,900 1360,900
  pour cut-out: 500,1630 570,1630 570,1560 500,1560
  lines w40: 0,10 4520,10 4520,2320 0,2320 0,10

## Text inside footprints (layer, text, board x,y; h text height)
C200: Top Overlay "+" at 4007.87,1252.95 h60
C301: Top Overlay "+" at 2286.42,628.73 h60
C302: Top Overlay "+" at 1745.39,720.54 h60
C305: Top Overlay "+" at 3798.82,442.09 h60 r270
P300: Top Overlay "6" at 4001.18,831.85 h50; Top Overlay "5" at 4011.18,731.85 h50; Top Overlay "2" at 3641.18,831.85 h50; Top Overlay "1" at 3661.18,731.85 h50